# Altium PCB pH.PcbDoc
Units mil, origin at the board's own origin, x right, y up, seen from the top; angles counter-clockwise.
Board outline 2390 x 655 mil, 2 copper layers (Top Layer, Bottom Layer); 17 components, 13 nets, 57 pads, 8 vias.
Unrouted connection lines stored in the file: 1.
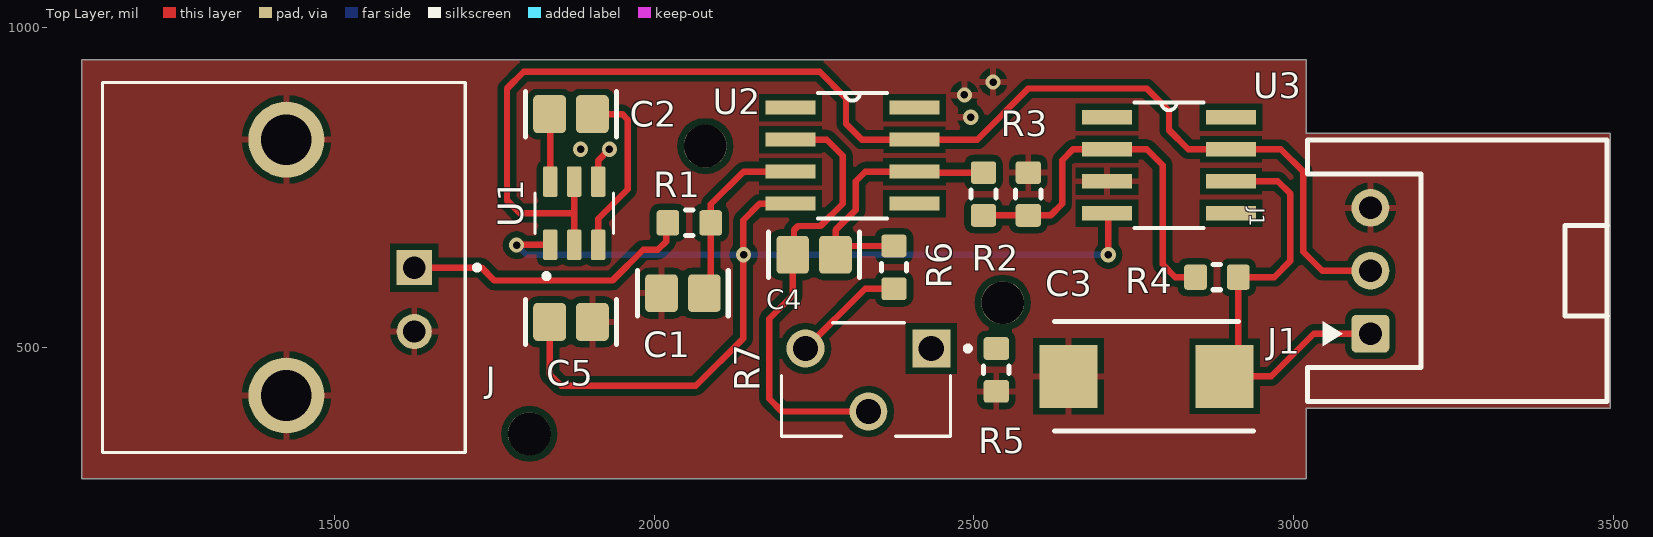
[diagram p0: Top Layer view]
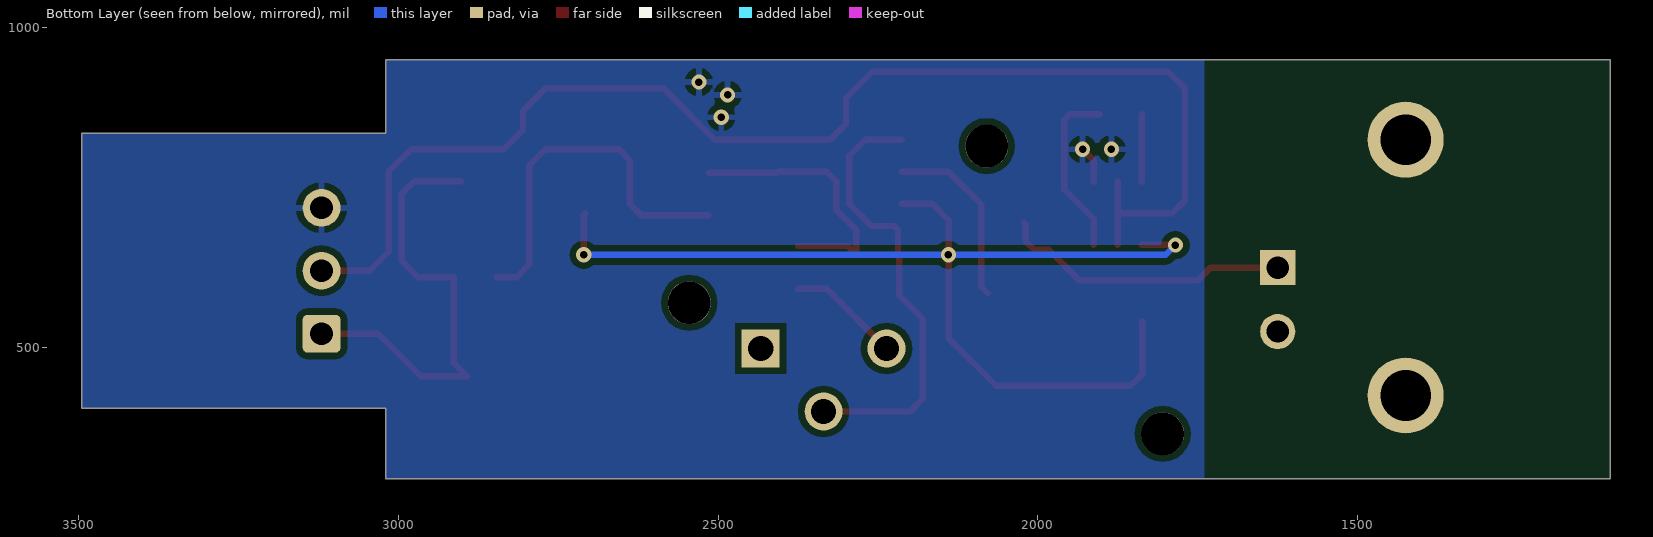
[diagram p1: Bottom Layer view, seen from below]
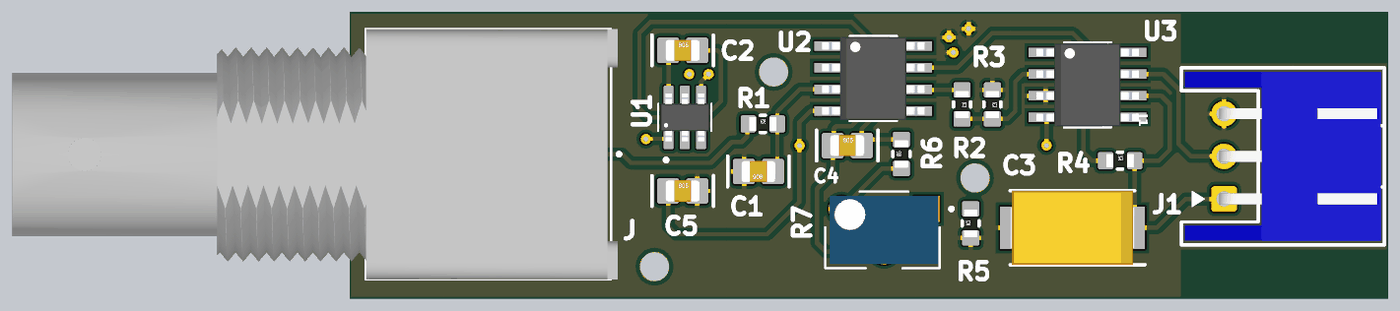
[diagram p2: 3D render of the assembled board from above, using the file's embedded part models]

## Layer stack, top to bottom
Top Solder: solder mask 0.4, Solder Resist, Dk 3.5
Top Layer: signal copper 1.4
Dielectric 1: dielectric 12.6, FR-4, Dk 4.8
Bottom Layer: signal copper 1.4
Bottom Solder: solder mask 0.4, Solder Resist, Dk 3.5

## Board outline
1105,295 1105,950 3020,950 3020,835 3495,835 3495,405 3020,405 3020,295

## Design rules (kind name [scope] priority, off if disabled: settings)
Clearance [All] p1: gap=10 ignorepadtopadclearanceinfootprint=FALSE except(0: Arc-Hole Track-Hole SMDPad-Hole THPad-Hole Via-Hole Fill-Hole Poly-Hole Region-Hole Text-Hole)
PolygonConnect [All] p1: connectstyle=Relief reliefconductorwidth=10 reliefentries=4 polygonreliefangle="90 Angle" airgapwidth=10
RoutingVias [All] p1: holewidth=28 width=50 viastyle="Through Hole" minholewidth=28 minwidth=50 maxholewidth=28 maxwidth=50
SolderMaskExpansion [All] p1: expansion=4 istentingtop=FALSE
Width [All] p1: maxlimit=10 minlimit=10 preferedwidth=10
30 further rules are at their usual default settings.

## Components (designator, comment, footprint, x,y, rotation, side; value= is the part's Value field where it differs from the comment)
C1 "2.2nF" 0805-C_N 2045,585 r180 top
C2 "1uF" 0805-C_N 1870,865 r0 top
C3 "4.7uF" CAPPM7344X430N 2770,455 r180 top
C4 "1uF" 0805-C_N 2250,645 r0 top
C5 "1uF" 0805-C_N 1870,540 r0 top
J "1-1337543-0" CONN_1-1337543-0 1625,625 r0 top
J1 "S3B-XH-A" CON_HDR1x3_2p50_RA_SHRD_JST-S3B-XH-A 3120,718.43 r270 top
R1 "4.7M" 0603-R_N 2055,695 r0 top
R2 "5.5K" 0603-R_N 2515,740 r270 top
R3 "60K" 0603-R_N 2585,740 r270 top
R4 "30.4K" 0603-R_N 2880,610 r0 top
R5 "1K" 0603-R_N 2535,465 r90 top
R6 "2.2K" 0603-R_N 2375,625.32 r90 top
R7 "5K" TRIM_PV37W502C01B00 2335,450 r180 top
U1 "ADM8828" SOT-23-6 1875,710 r90 top
U2 "CA3140MZ" SOIC127P600X175-8N 2310,800 r0 top
U3 "TL081" SOIC127P600X175-8N 2805,785 r0 top

## Footprints (in the part's own frame and the unit in brackets; to place one, negate y for a bottom-side part, rotate by r counter-clockwise, add the part's x,y. Pads: shape width x height; smd on the part's side, far side on the other; paste and mask are expansions set on the pad)
0603-R_N [mm] "Resistor 0603 Medium Density"
  rrect25% 0.9x1 smd: 1(-0.85,0) 2(0.85,0)
  silkscreen extent -0.15,-0.5 0.15,0.5, body extent -0.8,-0.4 0.8,0.4, height 0.3
0805-C_N [mm] "Capacitor 0805 Nominal Density"
  rrect25% 1.3x1.5 smd: 1(-0.85,0) 2(0.85,0)
  silkscreen extent -1.8,-0.9 1.8,0.9, body extent -1,-0.63 1,0.63, height 0.78
CAPPM7344X430N [mm]
  rect 2.3x2.5 smd: 1(-3.1,0) 2(3.1,0)
  silkscreen extent -4.25,-2.17 3.65,2.17, body extent -3.65,-2.17 3.65,2.17, height 4.3
CON_HDR1x3_2p50_RA_SHRD_JST-S3B-XH-A [mm] "Connector 3-Way 2.50mm Pitch Right Angle Shrouded JST S3B-XH-A"
  rrect25% 1.5x1.5 / inner round 1.5 / far side rrect25% 1.5x1.5 hole 0.9: 1(5,0)
  round 1.5 hole 0.9: 2(2.5,0) 3(0,0)
  silkscreen extent -2.7,-2.5 7.7,9.42, body extent -2.45,-2.3 7.45,9.2, height 6.15
CONN_1-1337543-0 [mm]
  rect 1.398x1.398 hole 0.89: 1(0,0)
  round 1.398 hole 0.89: 2(0,-2.54)
  round 3.015 hole 2.01: P1(-5.08,-5.08) P2(-5.08,5.08)
  silkscreen extent -12.38,-7.35 2.59,7.35, body extent -33.09,-7.37 2.41,7.33, height 16.15
SOIC127P600X175-8N [mil]
  rect 78x22 smd: 1(-97,75) 2(-97,25) 3(-97,-25) 4(-97,-75) 5(97,-75) 6(97,-25) 7(97,25) 8(97,75)
  silkscreen extent -54,-98 54,98, body extent -118,-96 118,96, height 69
SOT-23-6 [mm]
  rrect25% 1.21x0.58 smd: 1(-1.255,0.95) 2(-1.255,0) 3(-1.255,-0.95) 4(1.255,-0.95) 5(1.255,0) 6(1.255,0.95)
  silkscreen extent -2.6,-1.56 0.8,1.56, body extent -1.4,-1.45 1.4,1.45, height 1
TRIM_PV37W502C01B00 [mm]
  rect 1.508x1.508 hole 1: 1(-2.5,-1.23)
  round 1.508 hole 1: 2(0,1.27) 3(2.5,-1.23)
  silkscreen extent -4.05,-2.25 3.45,2.25, body extent -3.2,-2 3.2,2, height 7.9

## Part data
C1 C2 C4 C5: library part "CAP CER 1000PF 50V X7R 0805_(F5.1.2)", "CAP CER 1000PF 50V X7R 0805", Capacitance=1nF, Case Code (Imperial)=0805, Case Code (Metric)=2012, Dielectric=X7R, Manufacturer=Panasonic, Manufacturer Part Number=ECJ2VB1H102K, Max Operating Temperature=125°C, Min Operating Temperature=-55°C, Package Quantity=5000, Supplier Part Number 1=ECJ-2VB1H102K, Tolerance=10%, Voltage Rating=50V, Case/Package=0805, Category="Ceramic Capacitors", ComponentLink1Description=Datasheet, ComponentLink1URL=https://search.murata.co.jp/Ceramy/image/img/A01X/G101/ENG/GRM188C81E105KAAD-01A.pdf, ComponentLink2Description=https://datasheet.ciiva.com/25733/cl21b105kofnnwe-25733265.pdf?src-supplier=Digi-Key, ComponentLink2URL=https://datasheet.ciiva.com/25733/cl21b105kofnnwe-25733265.pdf?src-supplier=Digi-Key, ComponentLink3Description=https://api.kemet.com/component-edge/download/datasheet/C0805C474K5RECAUTO.pdf?src-supplier=Digi-Key, ComponentLink3URL=https://api.kemet.com/component-edge/download/datasheet/C0805C474K5RECAUTO.pdf?src-supplier=Digi-Key, ComponentLink4Description=https://datasheet.ciiva.com/6266/ecjhighcapacitance-6266926.pdf?src-supplier=Digi-Key, ComponentLink4URL=https://datasheet.ciiva.com/6266/ecjhighcapacitance-6266926.pdf?src-supplier=Digi-Key, ComponentLink5Description=https://datasheet.ciiva.com/6268/ecj-general-6268310.pdf?src-supplier=Digi-Key, ComponentLink5URL=https://datasheet.ciiva.com/6268/ecj-general-6268310.pdf?src-supplier=Digi-Key, ComponentLink6Description=https://datasheet.ciiva.com/6268/ecj-general-6268313.pdf?src-supplier=Digi-Key, ComponentLink6URL=https://datasheet.ciiva.com/6268/ecj-general-6268313.pdf?src-supplier=Digi-Key, ComponentLink7Description=https://datasheet.ciiva.com/6268/ecj-general-6268317.pdf?src-supplier=Digi-Key, ComponentLink7URL=https://datasheet.ciiva.com/6268/ecj-general-6268317.pdf?src-supplier=Digi-Key, Depth=1.25mm, Height=0.25inch, Lead Free="Contains Lead", Length=0.079inch, Mount="Surface Mount", Packaging="Tape and Reel", RoHS=Yes, RoHS Compliant=Yes, Supplier 1="Arrow Electronics", Thickness=0.028inch, Voltage Rating (DC)=50V, Weight=0.01lb, Width=0.049inch
C3: library part "220 uf Tantalun", "Capacitor Polarised", Arrow Part Number=TAJE227K010RNJ, Manufacturer_Name=AVX, Mouser Part Number=581-TAJE227K010R, Arrow Price/Stock=https://www.arrow.com/en/products/taje227k010rnj/avx, Datasheet Link=http://datasheets.avx.com/TAJ.pdf, Height=4.3mm, Manufacturer_Part_Number=TAJE227K010RNJ, Mouser Price/Stock=https://www.mouser.co.uk/ProductDetail/AVX/TAJE227K010RNJ?qs=A5TU6qcA1mE1rnfBa9dexw%3D%3D
J: "Conn ZDC/BNC RCP 0Hz to 4GHz 50Ohm Solder RA Thru-Hole Gold Over Nickel Over Copper Individual", Package=None, Availability=Unavailable, MF="TE Connectivity", MP=1-1337543-0, Number_of_Positions=1, Price=None, SnapEDA_Link=https://www.snapeda.com/parts/1-1337543-0/TE%20Connectivity%20AMP%20Connectors/view-part/490820/?ref=snap, TE_purchase_URL=https://www.te.com/usa-en/product-1-1337543-0.html?te_bu=Cor&te_type=disp&te_campaign=seda_glo_cor-seda-global-disp-prtnr-fy19-seda-model-bom-cta_sma-317_1&elqCampaignId=32493
J1: library part CON_HDR1x3_2p50_RA_SHRD_JST_S3B-XH-A, "Conn Shrouded Header (4 Sides) HDR 3 POS 2.5mm Solder RA Side Entry Thru-Hole Box", Color=Natural, Contact Resistance=20mR, Current Rating=3A, Housing Color=White, Insulation Resistance=1GR, Manufacturer=JST, Manufacturer Part Number=S3B-XH-A(LF)(SN), Max Operating Temperature=85°C, Max Voltage Rating (AC)=250V, Min Operating Temperature=-25°C, Package Quantity=1000, Supplier Part Number 1=455-2250-ND, Category="Headers and Wire Housings", ComponentLink4Description=Datasheet, ComponentLink4URL=http://www.jst-mfg.com/product/pdf/eng/eXH.pdf, Connector Type="Male Pin", Contact Material=Brass, Contact Plating=Tin,Lead,Copper, Depth=11.5mm, Gender=Male, Housing Material=Polyamide, Lead Free="Lead Free", Lead Pitch=2.5mm, Length=9.9mm, Max Current Rating=3A, Mount="Through Hole", Number of Contacts=3, Number of Positions=3, Number of Rows=1, Orientation="Right Angle", Packaging=Bulk, Pitch=2.5mm, Pricing 1="1=0.22000, 10=0.20400, 100=0.14140, 500=0.11968, 1000=0.09792, 5000=0.08704, 10000=0.07888 (USD)", REACH SVHC="No SVHC", RoHS=Yes, Stock 1=12903, Supplier 1=Digi-Key, Termination=Press-Fit, Voltage Rating=250V, Voltage Rating (AC)=250V, Wire/Cable Gauge=22AWG
R1 R2 R3 R4 R5 R6: library part "R_11K OHM 1% 1/10W 0603", "11 kOhms ±1% 0.1W, 1/10W Chip Resistor 0603 (1608 Metric) Automotive AEC-Q200 Thick Film", Case Code (Imperial)=0603, Case Code (Metric)=1608, Manufacturer=Panasonic, Manufacturer Part Number=ERJ-3EKF1102V, Max Operating Temperature=155°C, Max Power Dissipation=100mW, Min Operating Temperature=-55°C, Package Quantity=1, Resistance=11kR, Resistance Tolerance=1%, Resistor Type="Thick Film", Supplier Part Number 1=P11.0KHCT-ND, Temperature Coefficient=100ppm/°C, Voltage Rating=75V, Voltage Rating (DC)=50V, Case/Package=0603, ComponentLink1Description=Datasheet, ComponentLink1URL=https://industrial.panasonic.com/cdbs/www-data/pdf/RDO0000/AOA0000C331.pdf, ComponentLink2Description=https://datasheet.ciiva.com/28676/1678782-28676965.pdf?src-supplier=Element14, ComponentLink2URL=https://datasheet.ciiva.com/28676/1678782-28676965.pdf?src-supplier=Element14, ComponentLink3Description=https://datasheet.ciiva.com/24069/aoa0000ce2-24069096.pdf?src-supplier=Mouser, ComponentLink3URL=https://datasheet.ciiva.com/24069/aoa0000ce2-24069096.pdf?src-supplier=Mouser, ComponentLink4Description=https://datasheet.ciiva.com/28577/1678782-28577723.pdf?src-supplier=Element14, ComponentLink4URL=https://datasheet.ciiva.com/28577/1678782-28577723.pdf?src-supplier=Element14, ComponentLink5Description=https://datasheet.ciiva.com/46387/426256-46387019.pdf?src-supplier=Element14, ComponentLink5URL=https://datasheet.ciiva.com/46387/426256-46387019.pdf?src-supplier=Element14, ComponentLink6Description=https://datasheet.ciiva.com/9193/aoa0000ce2-9193884.pdf?src-supplier=Avnet, ComponentLink6URL=https://datasheet.ciiva.com/9193/aoa0000ce2-9193884.pdf?src-supplier=Avnet, ComponentLink7Description=https://datasheet.ciiva.com/15158/getdatasheetpartid-247528-15158908.pdf?src-supplier=Verical, ComponentLink7URL=https://datasheet.ciiva.com/15158/getdatasheetpartid-247528-15158908.pdf?src-supplier=Verical, ComponentLink8Description=https://datasheet.ciiva.com/16780/70260748-16780829.pdf?src-supplier=Allied+Electronics, ComponentLink8URL=https://datasheet.ciiva.com/16780/70260748-16780829.pdf?src-supplier=Allied+Electronics, ComponentLink9Description=https://datasheet.ciiva.com/46374/426256-46374157.pdf?src-supplier=Element14, ComponentLink9URL=https://datasheet.ciiva.com/46374/426256-46374157.pdf?src-supplier=Element14, ComponentLink10Description=https://datasheet.ciiva.com/43460/426256-43460542.pdf?src-supplier=Farnell, ComponentLink10URL=https://datasheet.ciiva.com/43460/426256-43460542.pdf?src-supplier=Farnell, Construction=Rectangular, Contact Plating=Tin, Depth=0.8mm, Features="Automotive AEC-Q200", Height=0.022inch, Lead Free="Lead Free", Length=1.6mm, Military Standard=Not, Mount="Surface Mount", Number of Terminations=2, Packaging="Tape and Reel", Power Rating=100mW, Pricing 1="1 = 0.10000, 10 = 0.03200, 100 = 0.01300, 1000 = 0.00583, 2500 = 0.00506 (USD)", Radiation Hardening=No, REACH SVHC="No SVHC", RoHS=Yes, RoHS Compliant=Yes, Series=ERJ, Stock 1=1618997, Supplier 1=Digi-Key, Termination=SMD/SMT, Tolerance=1%, Width=0.8mm
R7: library part PV37W502C01B00, "Res Cermet Trimmer 5K Ohm 10% 0.25W(1/4W) 12(Elec)Turns 1.78mm (6.71 X 4.5 X 8.26mm) Pin Thru-Hole Tube", Package="PV37W Murata", Availability="Not in stock", Check_prices=https://www.snapeda.com/parts/PV37W502C01B00/Murata/view-part/?ref=eda, MF="Murata Electronics", MP=PV37W502C01B00, Price=None, SnapEDA_Link=https://www.snapeda.com/parts/PV37W502C01B00/Murata/view-part/?ref=snap
U1: "Switched-Capacitor / Voltage Inverter with Shutdown", Package="SOT-23-6 Analog Devices", Availability=Unavailable, MF="Analog Devices", Price=None
U2: "General Purpose Amplifier 1 Circuit 8-SOIC", Package="SOIC-8 Intersil", Availability=Unavailable, MF="Renesas Electronics", MP=CA3140MZ, Price=None, SnapEDA_Link=https://www.snapeda.com/parts/CA3140MZ/Renesas%20Electronics%20America%20Inc./view-part/105358/?ref=snap
U3: "J-FET Amplifier 1 Circuit - 8-SOIC", Package="SOIC-8 STMicroelectronics", Availability="In Stock", Check_prices=https://www.snapeda.com/parts/TL081/STMicroelectronics/view-part/?ref=eda, MF=STMicroelectronics, MP=TL081, Price=None, Purchase-URL=https://pricing.snapeda.com/search/part/TL081/?ref=eda, SnapEDA_Link=https://www.snapeda.com/parts/TL081/STMicroelectronics/view-part/?ref=snap

## Free pads (board coordinates)
  round 66.93 hole 66.93 mask+0: 10(1805,365) 11(2080,815) 12(2545,570)

## Via types
v1: diameter 23.62, hole 11.81, Top Layer to Bottom Layer, 8 vias

## Nets (pads, with @x,y where several pads share a name; then routed paths per layer and width w, separated by ;. In a path a pad name is that pad's centre, name@x,y a point inside that pad or via, vN(x,y) a via of type N, cw(c..) or ccw(c..) an arc to the next point about the centre after c; other vN are vias at no path point)
+5: J1.2 U1.2 U1.5 U2.7 U3.7 | length 2057.5
  Top Layer w10: U1.2 1875,710 ; U1.5 1875,710 ; J1.2 3044.41,620 3014.88,649.53 3014.88,775.12 2980,810 U3.7 2835,810 2805,840 2805,870 2770,905 2585,905 2505,825 U2.7 2325,825 2300,850 2300,890 2259.06,930.94 1795.94,930.94 1770,905 1770,730 1790,710 1875,710
-5: C5.1 U1.1 U2.4 U3.4 | length 1743.5
  Top Layer w10: v1(1785,660) 1785.59,660.59 U1.1 ; C5.1@1837.6,541.06 C5.1 1836.54,458.46 1855,440 2065,440 2139.21,514.21 2139.21,699.21 2164.86,724.86 2212.86,724.86 U2.4 ; U3.4 2710,708 v1(2710,645)
  Bottom Layer w10: v1(1785,660) 1800,645 v1(2140,645) v1(2710,645)
Contact: J.1 R1.1 | length 457.8
  Top Layer w10: J.1 1730,625 1750.2,604.8 1934.8,604.8 1982.78,652.78 2005.86,652.78 2019.25,666.17 2019.25,692.72 R1.1
GND: C1.2 C3.2 C5.2 J1.3 J.2 J.P1 J.P2 R3.1 R5.1 U1.4 U3.3 | length 57.9
  Top Layer w10: U1.4 1912.4,792.4 v1(1930,810)
  other v1: 1885,810 2495,860 2485,895 2530,915
NetC1_1: C1.1 R1.2 U2.3 | length 288.6
  Top Layer w10: C1.1 2088.46,595 R1.2 2088.65,695.19 2088.65,723.83 2139.82,775 U2.3
NetC2_1: C2.1 U1.6 | length 106
  Top Layer w10: C2.1 1837.6,863.94 U1.6
NetC2_2: C2.2 U1.3 | length 273.7
  Top Layer w10: C2.2 1950,865 1958.68,856.32 1958.68,747.55 1912.4,701.28 U1.3
NetC4_1: C4.1 R7.2 U2.2 | length 703.8
  Top Layer w10: U2.2 2270,825 2295,800 2295,725 2260,690 2225,690 2218.67,683.67 2218.67,647.13 C4.1 2216.54,581.54 2180,545 2180,420 2200,400 R7.2
NetC4_2: C4.2 R2.1 R6.2 U2.6 | length 431.9
  Top Layer w10: C4.2 C4.2@2283.67,645.21 ; R6.2 2297.24,658.78 C4.2@2283.67,645.21 ; R2.1 2408.54,773.46 U2.6 2330,775 2315,760 2315,715 2283.67,683.67 C4.2@2283.67,645.21
NetR2_2: R2.2 R3.2 R4.1 U3.2 | length 588
  Top Layer w10: R2.2 2619.84,706.54 2637.9,724.6 2637.9,792.9 2655,810 U3.2 2770,810 2795,785 2795,630 2815,610 R4.1
NetR5_2: R5.2 R7.1
NetR6_1: R6.1 R7.3 | length 177.1
  Top Layer w10: R7.3 2330,591.85 R6.1
"Vout (0-5V)": C3.1 J1.1 R4.2 U3.6 | length 717.2
  Top Layer w10: U3.6 2975.18,760 2994.88,740.3 2994.88,635.47 2969.41,610 R4.2 2913.46,476.42 C3.1 2965,455 3031.57,521.57 J1.1
pads on no net: U2.1 U2.5 U2.8 U3.1 U3.5 U3.8

## Polygon pours and split planes (outlines as drawn)
GND on Bottom Layer "GND" (solid, remove dead copper, pour order 1): 1740,295 1740,950 3020,950 3020,835 3495,835 3495,405 3020,405 3020,295
GND on Top Layer "GND" (solid, remove dead copper, pour order 2): 1105,295 1105,950 3020,950 3020,835 3495,835 3495,405 3020,405 3020,295

## Silkscreen, mask and mechanical layers (free items; w line width, h text height)
Board:
  lines w7.87: 1105,295 3020,295 3020,405 3490,405 3495,405 3495,770 3495,835 3490,835 3020,835 3020,950 1105,950 1105,295